# Altium PCB PDM.PcbDoc
Units mil, origin at the board's own origin, x right, y up, seen from the top; angles counter-clockwise.
Board outline 5200 x 5000 mil, 2 copper layers (Top Layer, Bottom Layer); 69 components, 47 nets, 247 pads, 65 vias.
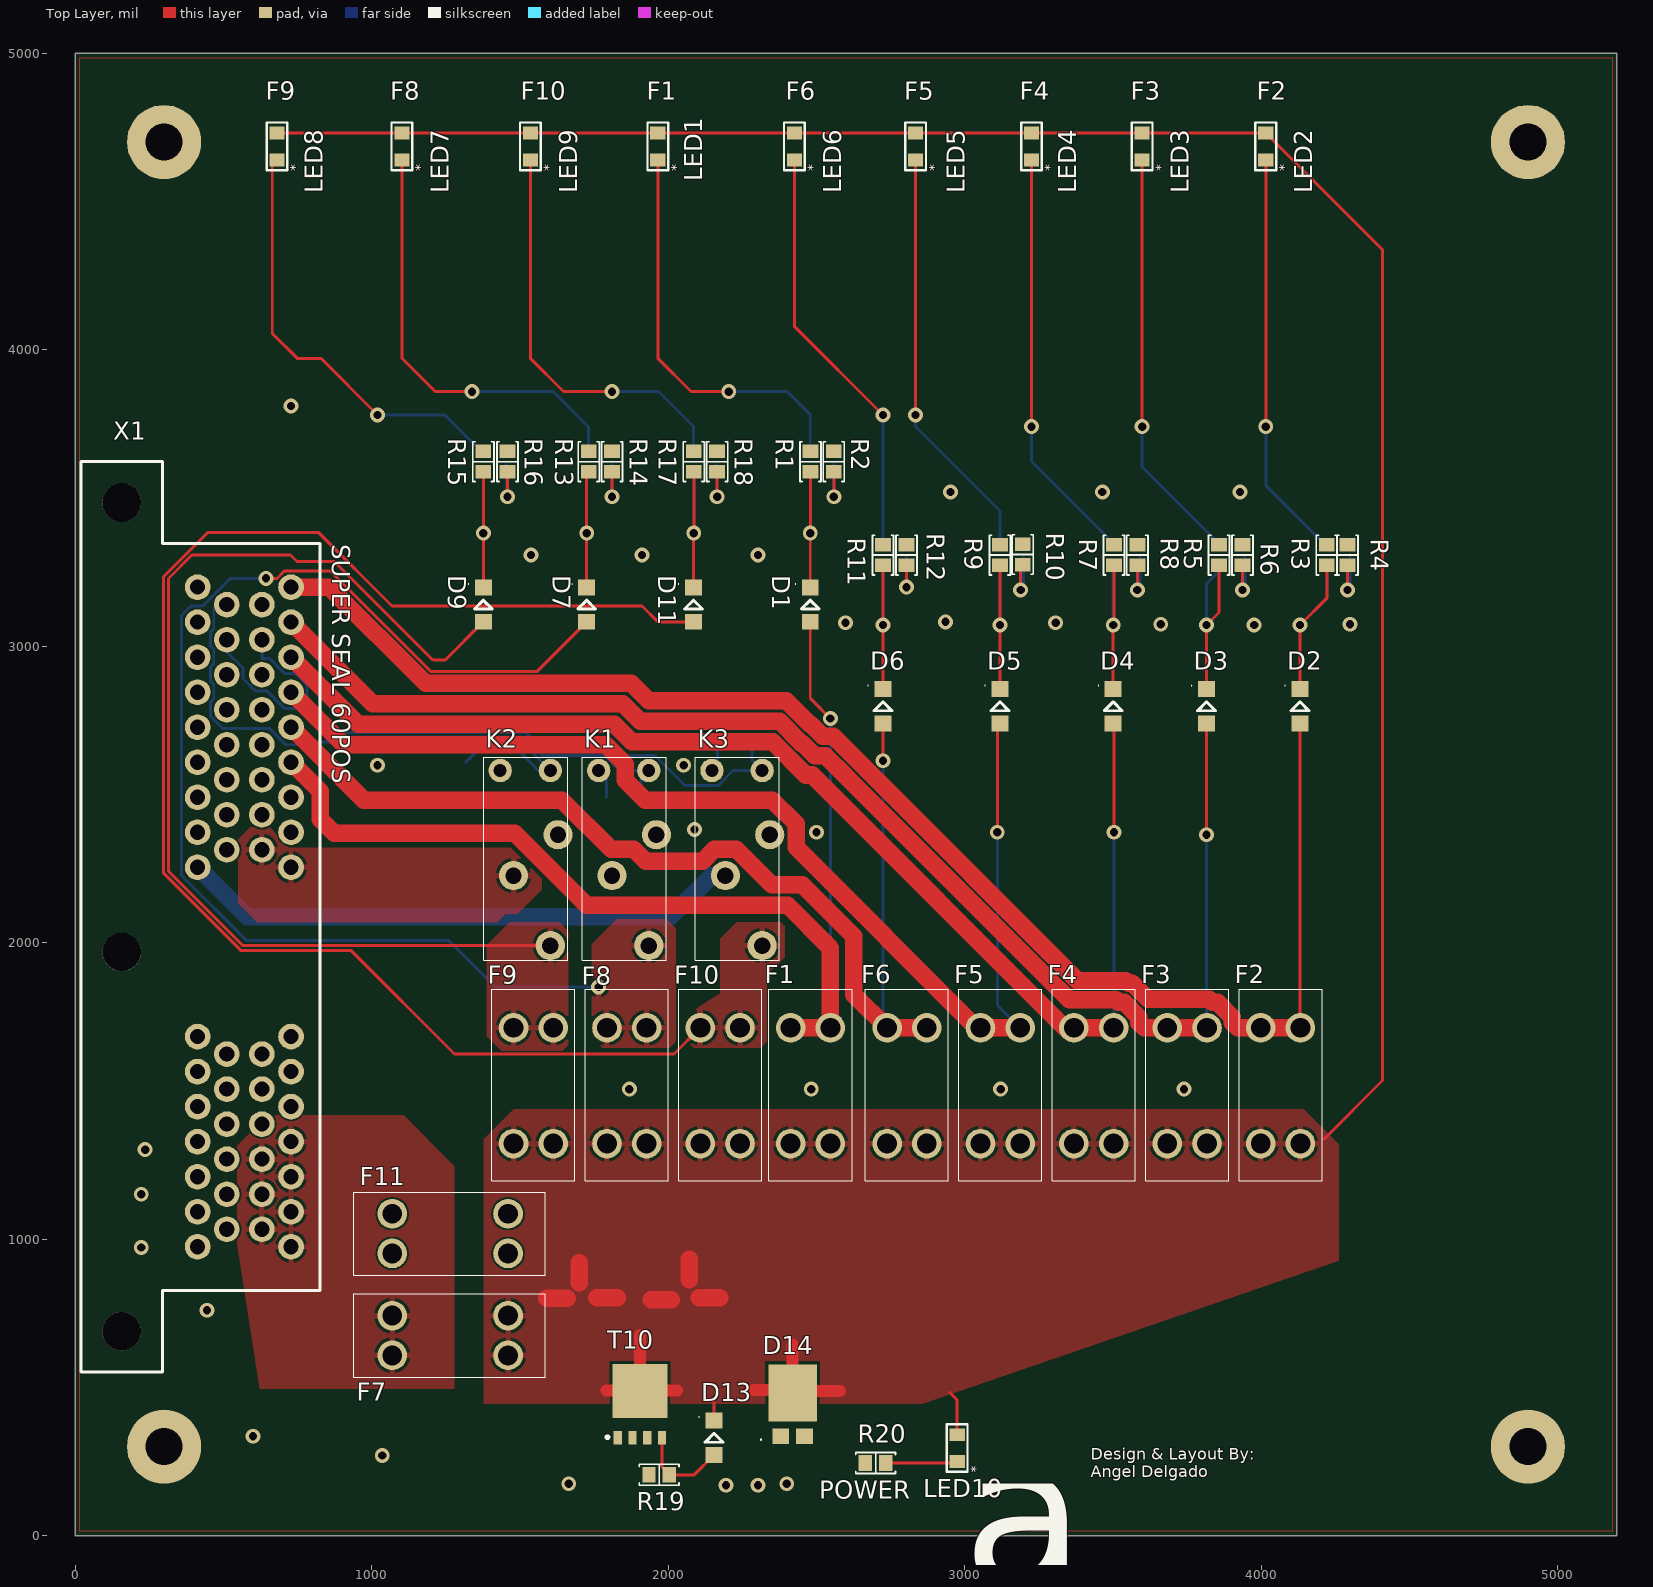
[diagram p0: Top Layer view]
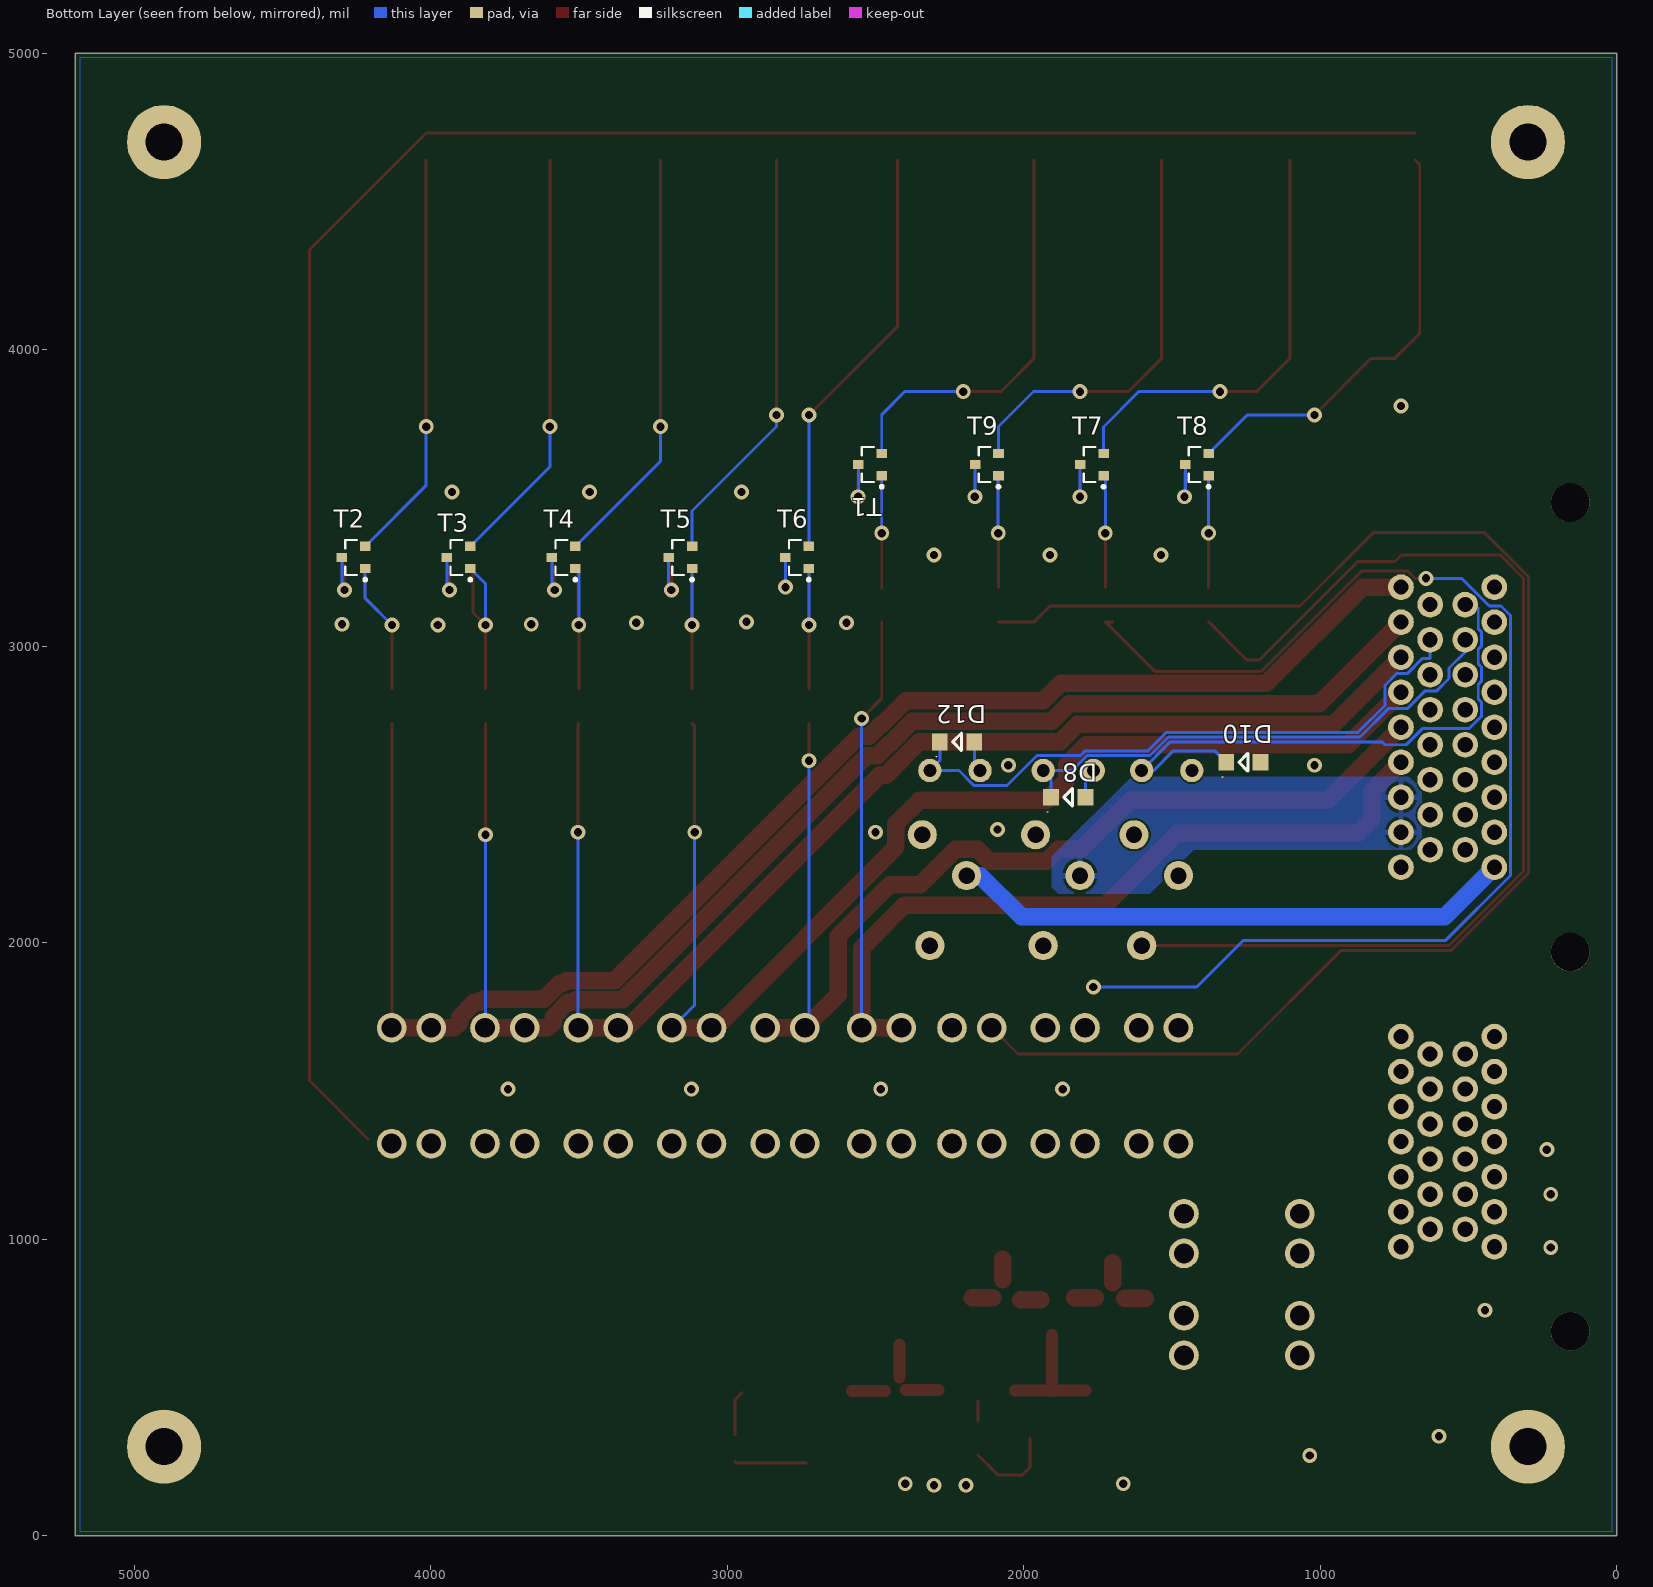
[diagram p1: Bottom Layer view, seen from below]
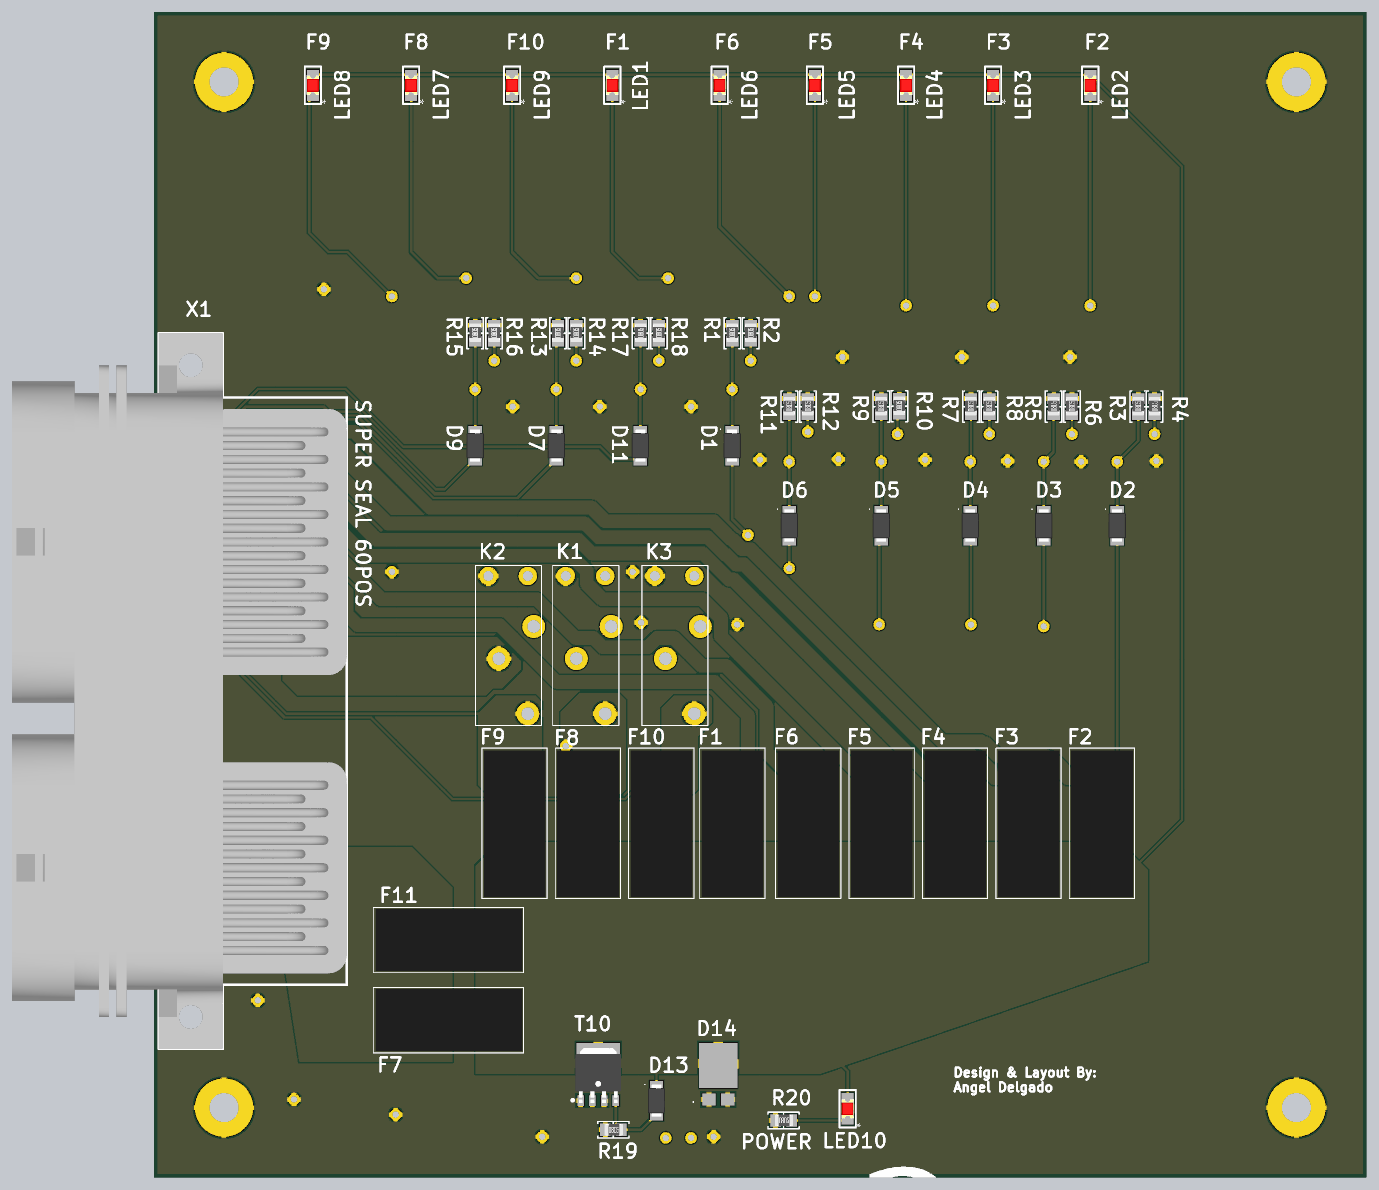
[diagram p2: 3D render of the assembled board from above, using the file's embedded part models]

## Layer stack, top to bottom
Top Solder: solder mask 0.4, Solder Resist, Dk 3.5
Top Layer: signal copper 1.4
Dielectric 1: dielectric 12.6, FR-4, Dk 4.8
Bottom Layer: signal copper 1.4
Bottom Solder: solder mask 0.4, Solder Resist, Dk 3.5

## Board outline
0,0 5200,0 5200,5000 0,5000

## Design rules (kind name [scope] priority, off if disabled: settings)
Clearance [All] p1: gap=6 ignorepadtopadclearanceinfootprint=FALSE except(8: Poly-Hole)
Height [All] p1: minheight=0 maxheight=1968.5 prefheight=500
HoleSize [All] p1: absolutevalues=TRUE maxlimit=196.85 minlimit=1 maxpercent=80.000 minpercent=20.000
PlaneConnect [InNet('GND')] p1: planeconnectstyle=Relief reliefexpansion=20 reliefentries=4 reliefconductorwidth=10 reliefairgap=10
PolygonConnect [All] p1: connectstyle=Relief reliefconductorwidth=20 reliefentries=4 polygonreliefangle="90 Angle" airgapwidth=10
RoutingVias [All] p1: holewidth=28 width=50 viastyle="Through Hole" minholewidth=28 minwidth=50 maxholewidth=28 maxwidth=50
SolderMaskExpansion [All] p1: expansion=4
Width [All] p1: maxlimit=196.85 minlimit=10 preferedwidth=10 minimp=50.000000 maximp=50.000000 favimp=50.000000
27 further rules are at their usual default settings.

## Classes and differential pairs
channel class "Relay fused CKT": "HC1_Relay fused CKT" "HC2_Relay fused CKT" "LC_Relay fused CKT"
channel class "Non-relay fused CKT": "1_Non-relay fused CKT1" "1_Non-relay fused CKT2" "2_Non-relay fused CKT" "3_Non-relay fused CKT" "4_Non-relay fused CKT" "5_Non-relay fused CKT"
component class Superseal: X1
component class RVP_OVP_HC: D13 D14 LED10 R19 R20 T10
component class PDM: F7
component class "LC_Relay fused CKT": D11 D12 F10 K3 LED9 R17 R18 T9
component class "HC2_Relay fused CKT": D9 D10 F9 K2 LED8 "LED8 (F9)" R15 R16 T8
component class "HC1_Relay fused CKT": D7 D8 F8 K1 LED7 "LED7 (F8)" R13 R14 T7
component class "5_Non-relay fused CKT": D6 F6 LED6 R11 R12 T6
component class "4_Non-relay fused CKT": D5 F5 LED5 R9 R10 T5
component class "3_Non-relay fused CKT": D4 F4 LED4 R7 R8 T4
component class "2_Non-relay fused CKT": D3 F3 LED3 R5 R6 T3
component class "1_Non-relay fused CKT2": D2 F2 LED2 R3 R4 T2
component class "1_Non-relay fused CKT1": D1 F1 LED1 R1 R2 T1

## Components (designator, comment, footprint, x,y, rotation, side; value= is the part's Value field where it differs from the comment)
D1 "DIODE" SOD123F 2479.39,3139.76 r90 top value=1A
D2 "DIODE" SOD123F 4130.94,2796.91 r90 top value=1A (schematic designator D1)
D3 "DIODE" SOD123F 3815.98,2796.91 r90 top value=1A (schematic designator D1)
D4 "DIODE" SOD123F 3501.02,2796.91 r90 top value=1A (schematic designator D1)
D5 "DIODE" SOD123F 3119.13,2796.91 r90 top value=1A (schematic designator D1)
D6 "DIODE" SOD123F 2724.68,2796.91 r90 top value=1A (schematic designator D1)
D7 "DIODE" SOD123F 1725.45,3139.76 r90 top value=1A (schematic designator D2)
D8 "DIODE" SOD123F 1850.39,2490.16 r0 bottom value=1A (schematic designator D3)
D9 "DIODE" SOD123F 1377.03,3139.76 r90 top value=1A (schematic designator D2)
D10 "DIODE" SOD123F 1259.84,2608.27 r0 bottom value=1A (schematic designator D3)
D11 "DIODE" SOD123F 2085.69,3139.76 r90 top value=1A (schematic designator D2)
D12 "DIODE" SOD123F 2225.39,2677.17 r0 bottom value=1A (schematic designator D3)
D13 "DDZ9701-7" SOD123F 2155,330 r90 top value=14Vz (schematic designator D4)
D14 "DIODE_2A1K" TO-277 2420,445 r90 top value="20 A" (schematic designator D5)
F1 "Fuse" 3568-MiniFuseHolder 2480.32,1517.4 r270 top (schematic designator F2)
F2 "Fuse" 3568-MiniFuseHolder 4065.47,1517.38 r270 top
F3 "Fuse" 3568-MiniFuseHolder 3750.51,1517.38 r270 top (schematic designator F2)
F4 "Fuse" 3568-MiniFuseHolder 3435.55,1517.38 r270 top (schematic designator F2)
F5 "Fuse" 3568-MiniFuseHolder 3120.59,1517.38 r270 top (schematic designator F2)
F6 "Fuse" 3568-MiniFuseHolder 2805.63,1517.38 r270 top (schematic designator F2)
F7 "Fuse" 3568-MiniFuseHolder 1265,675 r0 top (schematic designator F3)
F8 "Fuse" 3568-MiniFuseHolder 1860.75,1517.38 r270 top (schematic designator F1)
F9 "Fuse" 3568-MiniFuseHolder 1545.79,1517.38 r270 top (schematic designator F1)
F10 "Fuse" 3568-MiniFuseHolder 2175.71,1517.38 r270 top (schematic designator F1)
F11 "Fuse" 3568-MiniFuseHolder 1265,1018.7 r0 top (schematic designator F3)
K1 "ACTP112" ACTP112 1935.04,1989.82 r90 top
K2 "ACTP112" ACTP112 1602.87,1989.82 r90 top (schematic designator K1)
K3 "ACTP112" ACTP112 2317.21,1989.82 r90 top (schematic designator K1)
LED1 "LED" 0805_LED 1965.42,4685.04 r270 top value=Red
LED2 "LED" 0805_LED 4015.75,4685.04 r270 top value=Red (schematic designator LED1)
LED3 "LED" 0805_LED 3598.67,4685.04 r270 top value=Red (schematic designator LED1)
LED4 "LED" 0805_LED 3225.55,4685.04 r270 top value=Red (schematic designator LED1)
LED5 "LED" 0805_LED 2834.65,4685.04 r270 top value=Red (schematic designator LED1)
LED6 "LED" 0805_LED 2425.78,4685.04 r270 top value=Red (schematic designator LED1)
LED7 "LED" 0805_LED 1102.36,4685.04 r270 top value=Red (schematic designator LED2)
LED8 "LED" 0805_LED 681.07,4685.04 r270 top value=Red (schematic designator LED2)
LED9 "LED" 0805_LED 1535.43,4685.04 r270 top value=Red (schematic designator LED2)
LED10 "LED" 0805_LED 2975,295 r270 top value=Green (schematic designator LED3)
R1 "Resistor 47k 0805 1/10W 1%" "RES 0805/2012" 2480.32,3622.05 r90 top value=47k
R2 "Resistor 470 0805 1/10W 1%" "RES 0805/2012" 2559.06,3622.05 r90 top value=470
R3 "Resistor 47k 0805 1/10W 1%" "RES 0805/2012" 4221.49,3307.09 r90 top value=47k (schematic designator R1)
R4 "Resistor 470 0805 1/10W 1%" "RES 0805/2012" 4291.34,3307.09 r90 top value=470 (schematic designator R2)
R5 "Resistor 47k 0805 1/10W 1%" "RES 0805/2012" 3858.27,3307.09 r90 top value=47k (schematic designator R1)
R6 "Resistor 470 0805 1/10W 1%" "RES 0805/2012" 3937.01,3307.09 r90 top value=470 (schematic designator R2)
R7 "Resistor 47k 0805 1/10W 1%" "RES 0805/2012" 3503.94,3307.09 r90 top value=47k (schematic designator R1)
R8 "Resistor 470 0805 1/10W 1%" "RES 0805/2012" 3582.68,3307.09 r90 top value=470 (schematic designator R2)
R9 "Resistor 47k 0805 1/10W 1%" "RES 0805/2012" 3119.13,3307.09 r90 top value=47k (schematic designator R1)
R10 "Resistor 470 0805 1/10W 1%" "RES 0805/2012" 3196.48,3308.9 r90 top value=470 (schematic designator R2)
R11 "Resistor 47k 0805 1/10W 1%" "RES 0805/2012" 2724.68,3307.09 r90 top value=47k (schematic designator R1)
R12 "Resistor 470 0805 1/10W 1%" "RES 0805/2012" 2804.17,3307.09 r90 top value=470 (schematic designator R2)
R13 "Resistor 47k 0805 1/10W 1%" "RES 0805/2012" 1732.28,3622.05 r90 top value=47k (schematic designator R3)
R14 "Resistor 470 0805 1/10W 1%" "RES 0805/2012" 1811.02,3622.05 r90 top value=470 (schematic designator R4)
R15 "Resistor 47k 0805 1/10W 1%" "RES 0805/2012" 1377.03,3622.05 r90 top value=47k (schematic designator R3)
R16 "Resistor 470 0805 1/10W 1%" "RES 0805/2012" 1458.5,3622.05 r90 top value=470 (schematic designator R4)
R17 "Resistor 47k 0805 1/10W 1%" "RES 0805/2012" 2086.61,3622.05 r90 top value=47k (schematic designator R3)
R18 "Resistor 470 0805 1/10W 1%" "RES 0805/2012" 2165.35,3622.05 r90 top value=470 (schematic designator R4)
R19 "Resistor 47k 0805 1/10W 1%" "RES 0805/2012" 1970,205 r0 top value=47k (schematic designator R5)
R20 "Resistor 470 0805 1/10W 1%" "RES 0805/2012" 2700,245 r0 top value=470 (schematic designator R6)
T1 "PNP Transistor" SOT23-3 2518.76,3612.2 r0 bottom (schematic designator T)
T2 "PNP Transistor" SOT23-3 4260.86,3298.88 r0 bottom (schematic designator T)
T3 "PNP Transistor" SOT23-3 3906.53,3298.88 r0 bottom (schematic designator T)
T4 "PNP Transistor" SOT23-3 3552.2,3298.88 r0 bottom (schematic designator T)
T5 "PNP Transistor" SOT23-3 3158.5,3298.88 r0 bottom (schematic designator T)
T6 "PNP Transistor" SOT23-3 2764.8,3298.88 r0 bottom (schematic designator T)
T7 "PNP Transistor" SOT23-3 1770.73,3612.2 r0 bottom (schematic designator T2)
T8 "PNP Transistor" SOT23-3 1416.4,3612.2 r0 bottom (schematic designator T2)
T9 "PNP Transistor" SOT23-3 2125.06,3612.2 r0 bottom (schematic designator T2)
T10 "PSMN2R2-25YLC 25V Logic Level MOSFET" LFPAK-SO8 1905,436.3 r90 top value=N_Channel (schematic designator T1)
X1 "3-6437285-2" "SUPERSEAL 60POS 90Deg" 157.48,3484.25 r270 top value=CONN

## Footprints (in the part's own frame and the unit in brackets; to place one, negate y for a bottom-side part, rotate by r counter-clockwise, add the part's x,y. Pads: shape width x height; smd on the part's side, far side on the other; paste and mask are expansions set on the pad)
0805_LED [mm]
  rect 1.1x1.3 smd: 1(-1.15,0) 2(1.15,0)
  silkscreen extent -2.06,-0.89 2.03,0.89, body extent -1.05,-0.67 1.05,0.68, height 0.9
3568-MiniFuseHolder [mm] "3568 Mini Fuse Holder"
  round 2.54 hole 1.7: 1(-4.96,-1.7) 1(-4.96,1.7) 2(4.96,-1.7) 2(4.96,1.7)
  silkscreen extent -8.25,-3.56 8.13,3.56, body extent -8,-4.19 8,3.38, height 16.17
ACTP112 [mm] "ACTP112, 12V Relay"
  round 2 hole 1.1: COIL1(15,0) COIL2(15,4.3)
  round 2.5 hole 1.4: COM(0,0) NC(9.5,-0.65) NO(6,3.15)
  silkscreen extent -1.27,-1.49 16.13,5.72, body extent -1.27,-1.52 16.13,5.72, height 13.5
LFPAK-SO8 [mm] "TO, 5-Pads, Body 5.15x5.86mm (max), IPC Low Density"
  rect 1.15x0.7 smd: 1(-2.7,1.905) 2(-2.7,0.635) 3(-2.7,-0.635) 4(-2.7,-1.905)
  rect 4.6x4.7 smd: mb(1.3,0)
  silkscreen extent -2.77,2.65 -2.53,2.9, body extent -2.95,-2.5 3.05,2.5, height 1.25
"RES 0805/2012" [mm] "Chip Resistor, 2-Leads, Body 2.00x1.25mm, IPC Medium Density"
  rect 1.15x1.35 smd: 1(-0.875,0) 2(0.875,0)
  silkscreen extent -1.7,-0.9 1.7,0.9, body extent -0.95,-0.62 1.05,0.63, height 0.6
SOD123F [mm] "SODFL, 2-Leads, Body 1.80x3.50mm, IPC Low Density"
  rect 1.35x1.45 smd: 1(-1.475,0) 2(1.475,0)
  silkscreen extent -0.38,-0.76 1.8,1.29, body extent -1.75,-0.95 1.75,0.95, height 1.15
SOT23-3 [mm] "SOT23, 3-Leads, Body 2.92x2.37mm, Pitch 0.95mm, IPC Medium Density, NUP2105L"
  rect 0.9x0.8 smd: 1(-1,0.95) 2(-1,-0.95) 3(1,0)
  silkscreen extent -1.12,-1.5 0.7,2.02, body extent -0.7,-1.52 0.7,1.52, height 1.11
"SUPERSEAL 60POS 90Deg" [mm]
  round 2.2 hole 1.3: A1(7.25,14.5) A2(10.25,14.5) A3(13.25,14.5) A4(16.25,14.5) A5(19.25,14.5) A6(22.25,14.5) A7(25.25,14.5) A8(28.25,14.5) A9(31.25,14.5) A10(8.75,12) A11(11.75,12) A12(14.75,12) A13(17.75,12) A14(20.75,12) A15(23.75,12) A16(26.75,12) A17(29.75,12) A18(8.75,9) A19(11.75,9) A20(14.75,9) A21(17.75,9) A22(20.75,9) A23(23.75,9) A24(26.75,9) A25(29.75,9) A26(7.25,6.5) A27(10.25,6.5) A28(13.25,6.5) A29(16.25,6.5) A30(19.25,6.5) A31(22.25,6.5) A32(25.25,6.5) A33(28.25,6.5) A34(31.25,6.5) B1(45.75,14.5) B2(48.75,14.5) B3(51.75,14.5) B4(54.75,14.5) B5(57.75,14.5) B6(60.75,14.5) B7(63.75,14.5) B8(47.25,12) B9(50.25,12) B10(53.25,12) B11(56.25,12) B12(59.25,12) B13(62.25,12) B14(47.25,9) B15(50.25,9) B16(53.25,9) B17(56.25,9) B18(59.25,9) B19(62.25,9) B20(45.75,6.5) B21(48.75,6.5) B22(51.75,6.5) B23(54.75,6.5) B24(57.75,6.5) B25(60.75,6.5) B26(63.75,6.5)
  round 3.3 hole 3.3 unplated: CH(38.5,0) LH(0,0) RH(71,0)
  silkscreen extent -3.5,-3.5 74.5,17, body extent -3.5,-19.5 74.5,17, height 28.15
TO-277 [mm] "DFN, 3-Leads, Body 4.44x5.91mm, Pitch 3.68mm, IPC Medium Density, FSV20100V"
  rect 1.3x1.45 smd: 1(-2.794,1.016) 2(-2.794,-1.016)
  rect 4.9x4.15 smd: 3(0.913,0)
  silkscreen extent -3.12,2.67 -3.03,2.76, body extent -3.08,-2.31 3.08,2.32, height 1.2

## Part data
D1 D2 D3 D4 D5 D6 D7 D8 D9 D10 D11 D12: library part 2, "Diode Super Barrier 40V 1A Surface Mount SOD-123F", Manufacturer_id=1, MfrPartNo=1N5819HW1-7-F, Package=SOD-123, Power=40V, Supplier1PartNo=1N5819HW1-7-FDITR-ND, ComponentLink1Description=Datasheet, ComponentLink1URL=https://www.diodes.com/assets/Datasheets/1N5819HW1.pdf, Drawer_id=1, Ic=1A, idDiode=2, Link=https://www.digikey.com/product-detail/en/diodes-incorporated/1N5819HW1-7-F/1N5819HW1-7-FDITR-ND/5768523, Name=1N5819, Num_Circuits=1, Supplier1=Digi-Key, Type="Super Barrier"
D13: library part 10, "Zener Diode 14V 500mW ±5% Surface Mount SOD-123", Manufacturer_id=8, Package=SOD-123, Power=500mW, Supplier1PartNo=DDZ9701-7DICT-ND, ComponentLink1Description=Datasheet, ComponentLink1URL=https://www.diodes.com/assets/Datasheets/ds30410.pdf, Drawer_id=1, idDiode=10, Link=https://www.digikey.com/product-detail/en/diodes-incorporated/DDZ9701-7/DDZ9701-7DICT-ND/3877402, MfrPartNo=DDZ9701-7, Name=DDZ9701, Num_Circuits=1, Supplier1=Digi-Key, Type=Zener
D14: library part 11, Manufacturer_id=1, MfrPartNo=FSV20100V, Package=TO-277, Supplier1PartNo=FSV20100VCT-ND, ComponentLink1Description=Datasheet, ComponentLink1URL=https://www.fairchildsemi.com/datasheets/FS/FSV20100V.pdf, Drawer_id=1, idDiode=11, Link=https://www.digikey.com/product-detail/en/on-semiconductor/FSV20100V/FSV20100VCT-ND/5306682, Name=FSV20100V, Type=Schottky
F1 F2 F3 F4 F5 F6 F7 F8 F9 F10 F11: library part 3, Manufacturer_id=1, Drawer_id=1, idFuse=3, Name="3568 Mini Fuse Holder"
K1 K2 K3: library part 3, Coil_Voltage=12V, Manufacturer_id=1, Drawer_id=1, idRelay=3, LatestRevisionDate=17-Jul-2002, LatestRevisionNote="Re-released for DXP Platform.", Name=ACTP112, PackageReference=MODULE5B, Published=8-Jun-2000, Publisher="Altium Limited"
LED1 LED2 LED3 LED4 LED5 LED6 LED7 LED8 LED9: library part 1, Package=0805, Drawer_id=1, idLED=1, Manufacturer_id=1, Name=LED_0805_RED, Vf=0.7V
LED10: library part 2, Manufacturer_id=1, Package=0805, Brightness=7mcd, Drawer_id=1, Id=20mA, idLED=2, Link=https://www.digikey.com/product-detail/en/visual-communications-company-vcc/CMD17-21VGD-TR8/L62505CT-ND/254936, Name=CMD17_0805_GREEN, Vf=2.1V
R1 R3 R5 R7 R9 R11 R13 R15 R17 R19: library part 545, Manufacturer_id=1, Package=0805, Power=1/10W, Tolerance=1%, ComponentLink1Description=Datasheet, Created_By="Nick Mah", Created_Date=2018-10-20, Drawer_id=1, idResistor=545, Name=Res_47k_0805_1/10W_1%, Supplier 1=Digi-Key
R2 R4 R6 R8 R10 R12 R14 R16 R18 R20: library part 497, Manufacturer_id=1, Package=0805, Power=1/10W, Tolerance=1%, ComponentLink1Description=Datasheet, Created_By="Nick Mah", Created_Date=2018-10-20, Drawer_id=1, idResistor=497, Name=Res_470_0805_1/10W_1%, Supplier 1=Digi-Key
T1 T2 T3 T4 T5 T6 T7 T8 T9: library part 3, Manufacturer_id=1, MfrPartNo=MMBT4403WT1G, Package=SOT23-3, Created_By=Angel, Drawer_id=1, Ic=600mA, idBJT=3, Link=https://www.digikey.com/product-detail/en/on-semiconductor/MMBT4403WT1G/MMBT4403WT1GOSCT-ND/3487572, Name=MMBT4403WT1G, Num_Circuits=1, Type=PNP, Vce(Max)=-40V
T10: library part 3, "N-Channel 25V 100A (Tc) 106W (Tc) Surface Mount LFPAK56, Power-SO8", Manufacturer_id=6, MfrPartNo=PSMN2R2-25YLC,115, Package=LFPAK-SO8, Supplier1PartNo=1727-5299-1-ND, ComponentLink1Description=Datasheet, ComponentLink1URL=https://assets.nexperia.com/documents/data-sheet/PSMN2R2-25YLC.pdf, Created_By=Nick, Drawer_id=1, Id=100A, idFETs=3, Link=https://www.digikey.com/product-detail/en/nexperia-usa-inc/PSMN2R2-25YLC115/1727-5299-1-ND/2674299, Name=PSMN2R2, Num_Circuits=1, Rds_On=2.5mOhm, Supplier1=Digi-Key, Vdss=25V, Vgs(Max)=20V, Vgs(typ)=10V
X1: library part 3, "90 Degree", Manufacturer_id=1, ComponentLink1Description=Datasheet, Drawer_id=1, idConn=3, Link=https://www.te.com/usa-en/product-3-6437285-2.html, MfrPartNo=3-6437285-2, Name="AMP Superseal 60POS 90Deg", Num_Contacts=60, Num_Rows=4, Pitch="3 mm"

## Free pads (board coordinates)
  round 250 hole 125: MH(300,300) MH(300,4700) MH(4900,300) MH(4900,4700)

## Via types
v1: diameter 50, hole 28, Top Layer to Bottom Layer, 65 vias

## Nets (pads, with @x,y where several pads share a name; then routed paths per layer and width w, separated by ;. In a path a pad name is that pad's centre, name@x,y a point inside that pad or via, vN(x,y) a via of type N, cw(c..) or ccw(c..) an arc to the next point about the centre after c; other vN are vias at no path point)
12V_IN: F7.1 X1.B4 X1.B5 X1.B6 X1.B7 X1.B11 X1.B12 X1.B13
+12: D13.2 D14.3 F1.2 F2.2 F3.2 F4.2 F5.2 F6.2 F7.2 F8.2 F9.2 F10.2 LED1.1 LED2.1 LED3.1 LED4.1 LED5.1 LED6.1 LED7.1 LED8.1 LED9.1 LED10.1 T10.mb | length 8362
  Top Layer w10: LED8.1 LED7.1 LED9.1 LED1.1 LED6.1 LED5.1 LED4.1 LED3.1 LED2.1 4409.45,4336.61 4409.45,1534.92 4212.6,1338.07 ; D13.2 2155,453.89 ; 2950,482.48 2975,457.48 LED10.1
  Top Layer w40: 1792.89,490 T10.mb@1905,490 ; T10.mb T10.mb@1905,490 ; 1905,677.15 T10.mb@1905,490 ; 2030,490 T10.mb@1905,490 ; 2287.89,490.94 D14.3@2400,490.94 ; D14.3@2420,532.89 2420,645 ; D14.3@2467.77,487.48 2579.88,487.48
  Top Layer w59.06: 1591.37,800.81 1659.54,800.81 ; 1700.45,852.6 1700.45,920.77 ; 1759.73,802.42 1827.9,802.42 ; 1943,794.92 2011.17,794.92 ; 2070.89,863.81 2070.89,931.98 ; 2105.69,802.42 2173.86,802.42
GND: D8.1 D10.1 D12.1 D14.1 D14.2 K1.COIL2 K2.COIL2 K3.COIL2 pad.MH R1.2 R2.2 R3.2 R4.2 R5.2 R6.2 R7.2 R8.2 R9.2 R10.2 R11.2 R12.2 R13.2 R14.2 R15.2 R16.2 R17.2 R18.2 R19.1 R20.1 T10.1 T10.2 T10.3 X1.B17 X1.B18 X1.B19 X1.B23 X1.B24 X1.B25 X1.B26 | length 206.1
  Bottom Layer w10: K1.COIL2 1792.32,2553.8 D8.1 ; K3.COIL2 2167.32,2599.78 D12.1
  other v1: 1665,175 2400,175 1036.23,270 600,335 445,760 223.36,971.67 223.36,1151.57 236.22,1301.86 1869.34,1505.91 2482.94,1505.91 3121.45,1505.91 3740.16,1505.91 2500.59,2372.05 2088.86,2381.18 1020.02,2598.43 2052.35,2598.43 3976.38,3070.87 3661.42,3073.78 4299.43,3073.78 2598.43,3078.96 3307.09,3078.96 2935.5,3081.69 1537.86,3307.09 1911.84,3307.09 2303.15,3307.09 2952.76,3519.57 3464.57,3519.57 3928.92,3519.57 728.35,3809.81
HC_1_SS: K1.NO X1.A7 X1.A8
HC_2_SS: K2.NO X1.A9 X1.A17
NetD1_1: D1.1 F1.1 X1.A6 | length 3933
  Top Layer w10: D1.1 2479.39,2823.76 v1(2547.24,2755.91)
  Top Layer w59.06: X1.A6 826.77,2509.84 826.77,2416.71 874.72,2368.76 1483.6,2368.76 1726.38,2125.98 2403.03,2125.98 2547.24,1981.77 2547.24,1712.68 F1.1@2413.39,1712.68
  Bottom Layer w10: F1.1@2547.24,1712.68 v1(2547.24,2755.91)
NetD1_2: D1.2 R1.1 T1.1 | length 584
  Top Layer w10: D1.2 v1(2479.39,3380.91) 2480.32,3381.83 R1.1
  Bottom Layer w10: v1(2479.39,3380.91) T1.1
NetD2_1: D2.1 F2.1 X1.A1 | length 5057.1
  Top Layer w10: D2.1 4130.94,1714.12 F2.1@4132.4,1712.66
  Top Layer w59.06: X1.A1 857.93,3198.82 1182.27,2874.49 1876.19,2874.49 1935.4,2815.28 2398.99,2815.28 2477.89,2736.38 2481.17,2736.38 2522.17,2695.38 2557.57,2695.38 2664.16,2588.79 2664.16,2588.3 3380.7,1871.75 3544.27,1871.75 3552.78,1863.24 3564.85,1863.24 3619.27,1808.82 3824.5,1808.82 3835.14,1798.19 3852.87,1798.19 3902.97,1748.09 3902.97,1730.36 3920.67,1712.66 3998.54,1712.66 F2.1@4132.4,1712.66
NetD2_2: D2.2 R3.1 T2.1 | length 683.3
  Top Layer w10: D2.2 v1(4130.94,3070.87) 4221.49,3161.42 R3.1
  Bottom Layer w10: v1(4130.94,3070.87) 4221.49,3161.42 T2.1
NetD3_1: D3.1 F3.1 X1.A2 | length 4693.2
  Top Layer w10: v1(3815.98,2363.84) D3.1
  Top Layer w59.06: X1.A2 1003.62,2805.43 1847.59,2805.43 1906.8,2746.22 2376.04,2746.22 2450.94,2671.32 2454.23,2671.32 2495.23,2630.32 2530.62,2630.32 2599.1,2561.85 2599.1,2561.35 3278.96,1881.49 3353.75,1806.7 3511.67,1806.7 3520.18,1798.19 3537.91,1798.19 3588.01,1748.09 3588.01,1730.36 3605.71,1712.66 3683.58,1712.66 F3.1@3817.44,1712.66
  Bottom Layer w10: v1(3815.98,2363.84) 3815.98,1714.12 F3.1@3817.44,1712.66
NetD3_2: D3.2 R5.1 T3.1 | length 647
  Top Layer w10: D3.2 v1(3815.98,3070.87) 3858.27,3113.15 R5.1
  Bottom Layer w10: v1(3815.98,3070.87) 3815.98,3210.3 T3.1
NetD4_1: D4.1 F4.1 X1.A3 | length 4321.1
  Top Layer w10: D4.1 3503.94,2735.92 v1(3503.94,2372.05)
  Top Layer w59.06: X1.A3 954.57,2736.38 1818.98,2736.38 1878.2,2677.17 2353.1,2677.17 2464.99,2565.27 2485.41,2565.27 3338.02,1712.66 3368.62,1712.66 F4.1@3502.48,1712.66
  Bottom Layer w10: F4.1@3502.48,1712.66 3501.02,1714.12 3503.94,1717.03 v1(3503.94,2372.05)
NetD4_2: D4.2 R7.1 T4.1 | length 614.4
  Top Layer w10: D4.2 v1(3501.02,3070.87) 3503.94,3073.78 R7.1
  Bottom Layer w10: v1(3501.02,3070.87) 3501.02,3249.67 T4.1
NetD5_1: D5.1 F5.1 X1.A4 | length 4068
  Top Layer w10: v1(3110.24,2372.05) 3110.24,2729.94 D5.1
  Top Layer w59.06: X1.A4 905.51,2667.32 1790.38,2667.32 1856.14,2601.56 1856.14,2547.7 1923.52,2480.31 2351.82,2480.31 2431.54,2400.6 2431.54,2321.1 3039.98,1712.66 3053.66,1712.66 F5.1@3187.52,1712.66
  Bottom Layer w10: v1(3110.24,2372.05) 3110.24,1789.94 F5.1@3187.52,1712.66
NetD5_2: D5.2 R9.1 T5.1 | length 608.3
  Top Layer w10: D5.2 v1(3119.13,3070.87) R9.1
  Bottom Layer w10: v1(3119.13,3070.87) T5.1
NetD6_1: D6.1 F6.1 X1.A5 | length 3743.8
  Top Layer w10: v1(2724.68,2613.37) D6.1
  Top Layer w59.06: X1.A5 974.41,2480.31 1642,2480.31 1807.53,2314.79 1884.19,2314.79 1923.87,2275.1 2116.75,2275.1 2156.43,2314.79 2229.95,2314.79 2349.69,2195.04 2452.34,2195.04 2626.65,2020.73 2626.65,1824.71 2738.7,1712.66 F6.1@2872.56,1712.66
  Bottom Layer w10: v1(2724.68,2613.37) 2724.68,1726.68 F6.1@2738.7,1712.66
NetD6_2: D6.2 R11.1 T6.1 | length 608.6
  Top Layer w10: D6.2 v1(2724.68,3070.87) R11.1
  Bottom Layer w10: v1(2724.68,3070.87) 2724.68,3260.73 T6.1
NetD7_1: D7.1 F8.1 K1.COM | length 4101.4
  Top Layer w10: v1(643.84,3228.35) 681.07,3228.35 705.85,3253.13 860.94,3253.13 1199.05,2915.02 1558.78,2915.02 D7.1 D7.1@1700.83,3081.69
  Bottom Layer w10: v1(643.84,3228.35) 523.59,3228.35 430.26,3135.02 390.89,3135.02 359.08,3103.2 359.08,2226.35 577.55,2007.87 1259.84,2007.87 1417.32,1850.39 v1(1765.75,1850.39)
NetD7_2: D7.2 R13.1 T7.1 | length 588.9
  Top Layer w10: D7.2 v1(1725.45,3380.91) 1725.45,3580.77 R13.1
  Bottom Layer w10: v1(1725.45,3380.91) 1725.45,3568.9 T7.1
NetD8_2: D8.2 K1.COIL1 X1.A19 | length 1770.6
  Top Layer w10: X1.A19@498.81,3034.65 X1.A19
  Bottom Layer w10: X1.A19 511.81,2980.34 566.12,2926.04 566.12,2890.54 607.43,2849.24 646.8,2849.24 705.85,2790.18 769.63,2790.18 866.64,2693.17 1512.71,2693.17 1575.13,2630.75 1786.61,2630.75 1836.98,2580.38 K1.COIL1 1908.46,2553.8 D8.2
NetD9_1: D9.1 F9.1 K2.COM | length 3674.6
  Top Layer w10: D9.1 1248.09,2952.76 1206.57,2952.76 874.2,3285.13 748.58,3285.13 726.62,3307.09 393.7,3307.09 314.96,3228.35 314.96,2240.32 565.45,1989.82 K2.COM
NetD9_2: D9.2 R15.1 T8.1 | length 583.7
  Top Layer w10: D9.2 v1(1377.03,3380.91) R15.1
  Bottom Layer w10: v1(1377.03,3380.91) T8.1
NetD10_2: D10.2 K2.COIL1 X1.A18 | length 2018.2
  Top Layer w10: X1.A18 X1.A18@511.81,3166.03
  Bottom Layer w10: X1.A18 498.81,3126.76 467.69,3126.76 467.69,3058.21 457.5,3048.02 457.5,2999.16 467.69,2988.97 467.69,2940.1 457.5,2929.91 457.5,2881.05 467.69,2870.86 467.69,2821.99 457.5,2811.8 457.5,2762.94 498.81,2721.63 656.29,2721.63 710.6,2667.32 782.65,2667.32 792.5,2677.17 1506.08,2677.17 K2.COIL1 1562.43,2580.38 1496.06,2646.75 1356.39,2646.75 D10.2
NetD11_1: D11.1 F10.1 K3.COM | length 5072.8
  Top Layer w10: D11.1 1965.42,3081.69 1911.84,3135.27 1069.31,3135.27 822.12,3382.46 446.44,3382.46 298.96,3234.97 298.96,2233.69 558.83,1973.82 929.72,1973.82 1279.53,1624.02 2020.14,1624.02 F10.1@2108.78,1712.66
NetD11_2: D11.2 R17.1 T9.1 | length 584.4
  Top Layer w10: D11.2 2085.69,3380.91 2086.61,3381.83 R17.1
  Bottom Layer w10: T9.1 2086.61,3573.88 v1(2086.61,3380.91)
NetD12_2: D12.2 K3.COIL1 X1.A11 | length 2099.3
  Bottom Layer w10: X1.A11 629.92,2957.85 656.29,2957.85 705.85,2908.29 741.35,2908.29 782.65,2866.98 782.65,2799.78 873.27,2709.17 1519.34,2709.17 1581.76,2646.75 1793.24,2646.75 1809.24,2630.75 1955.9,2630.75 2056.64,2530.01 2168.78,2530.01 2219.15,2580.38 K3.COIL1 2283.46,2614.12 D12.2
NetD13_1: D13.1 R19.2 T10.4 | length 313.4
  Top Layer w10: T10.4 1980,229.45 R19.2 2088.07,205 D13.1
NetK3_NO: K3.NO X1.A34 | length 1906.9
  Bottom Layer w10: K3.NO@2147.3,2226.04 K3.NO
  Bottom Layer w59.06: X1.A34 580.71,2086.61 2007.87,2086.61 K3.NO@2147.3,2226.04
NetLED1_2: LED1.2 T1.2 | length 1392.8
  Top Layer w10: LED1.2 1965.42,3970.47 2077.62,3858.27 v1(2204.72,3858.27)
  Bottom Layer w10: v1(2204.72,3858.27) 2401.57,3858.27 2479.39,3780.45 T1.2
NetLED2_2: LED2.2 T2.2 | length 1388.7
  Top Layer w10: v1(4015.75,3740.16) LED2.2
  Bottom Layer w10: v1(4015.75,3740.16) 4015.75,3542.03 T2.2
NetLED3_2: LED3.2 T3.2 | length 1414.7
  Top Layer w10: v1(3598.67,3740.16) LED3.2
  Bottom Layer w10: v1(3598.67,3740.16) 3598.67,3604.77 T3.2
NetLED4_2: LED4.2 T4.2 | length 1422.5
  Top Layer w10: v1(3225.55,3740.16) LED4.2
  Bottom Layer w10: v1(3225.55,3740.16) 3225.55,3623.56 T4.2
NetLED5_2: LED5.2 T5.2 | length 1421.3
  Top Layer w10: v1(2834.65,3779.53) LED5.2
  Bottom Layer w10: v1(2834.65,3779.53) 2834.65,3740.16 3119.13,3455.67 T5.2
NetLED6_2: LED6.2 T6.2 | length 1427.6
  Top Layer w10: LED6.2 2425.78,4078.43 v1(2724.68,3779.53)
  Bottom Layer w10: v1(2724.68,3779.53) 2724.68,3337.03 T6.2
NetLED7_2: LED7.2 T7.2 | length 1483.7
  Top Layer w10: LED7.2 1102.36,3970.47 1214.57,3858.27 v1(1338.58,3858.27)
  Bottom Layer w10: v1(1338.58,3858.27) 1612.33,3858.27 1731.36,3739.23 T7.2
NetLED8_2: LED8.2 T8.2 | length 1471.6
  Top Layer w10: LED8.2 665.07,4623.76 665.07,4054.4 749,3970.47 829.08,3970.47 v1(1020.02,3779.53)
  Bottom Layer w10: v1(1020.02,3779.53) 1247.11,3779.53 T8.2
NetLED9_2: LED9.2 T9.2 | length 1405.5
  Top Layer w10: LED9.2 1535.43,3970.47 1647.64,3858.27 v1(1811.02,3858.27)
  Bottom Layer w10: v1(1811.02,3858.27) 1967.58,3858.27 2085.69,3740.16 T9.2
NetLED10_2: LED10.2 R20.2 | length 242.5
  Top Layer w10: R20.2 2970.28,245 LED10.2
NetR2_1: R2.1 T1.3 | length 192.3
  Top Layer w10: v1(2559.06,3503.94) R2.1
  Bottom Layer w10: T1.3 2558.13,3504.86 v1(2559.06,3503.94)
NetR4_1: R4.1 T2.3 | length 188.4
  Top Layer w10: v1@4291.34,3197.83 R4.1
  Bottom Layer w10: v1(4291.34,3188.98) 4300.23,3197.87 T2.3
NetR6_1: R6.1 T3.3 | length 186.9
  Top Layer w10: v1@3937.01,3199.29 R6.1
  Bottom Layer w10: v1(3937.01,3188.98) 3945.9,3197.87 T3.3
NetR8_1: R8.1 T4.3 | length 188.4
  Top Layer w10: v1@3582.68,3197.83 R8.1
  Bottom Layer w10: v1(3582.68,3188.98) 3591.57,3197.87 T4.3
NetR10_1: R10.1 T5.3 | length 186.9
  Top Layer w10: v1@3188.98,3199.29 R10.1@3188.98,3272.64
  Bottom Layer w10: v1(3188.98,3188.98) 3197.87,3197.87 T5.3
NetR12_1: R12.1 T6.3 | length 173.9
  Top Layer w10: v1(2804.17,3198.82) R12.1
  Bottom Layer w10: v1(2804.17,3198.82) T6.3
NetR14_1: R14.1 T7.3 | length 192.3
  Top Layer w10: v1(1811.02,3503.94) R14.1
  Bottom Layer w10: T7.3 1810.1,3504.86 v1(1811.02,3503.94)
NetR16_1: R16.1 T8.3 | length 193.1
  Top Layer w10: v1(1458.5,3503.94) R16.1
  Bottom Layer w10: T8.3 1455.77,3506.67 v1(1458.5,3503.94)
NetR18_1: R18.1 T9.3 | length 192.3
  Top Layer w10: v1(2165.35,3503.94) R18.1
  Bottom Layer w10: T9.3 2164.43,3504.86 v1(2165.35,3503.94)
pads on no net: F11.1 F11.2 K1.NC K2.NC K3.NC X1.A10 X1.A12 X1.A13 X1.A14 X1.A15 X1.A16 X1.A20 X1.A21 X1.A22 X1.A23 X1.A24 X1.A25 X1.A26 X1.A27 X1.A28 X1.A29 X1.A30 X1.A31 X1.A32 X1.A33 X1.B1 X1.B2 X1.B3 X1.B8 X1.B9 X1.B10 X1.B14 X1.B15 X1.B16 X1.B20 X1.B21 X1.B22 X1.CH X1.LH X1.RH
copper on no net:
  other v1: 2195,170 2303.15,170

## Polygon pours and split planes (outlines as drawn)
no net on Top Layer "Top Layer-No Net 11" (solid, pour order 100): 5,4445
GND on Top Layer "Top Layer-GND 1" (solid, shelved, pour order 98): 15,4985 5185,4985 5185,15 15,15
12V_IN on Top Layer "Top Layer-12V_IN" (solid, pour order 96): 1107.68,1417.32 650.1,1417.32 546.98,1314.2 546.98,984.25 622.95,495 1279.53,495 1279.53,885.83 1279.53,1245.47
no net on Top Layer "Top Layer-No Net 3" (solid, pour order 92): 3263.51,3990.42
+12 on Top Layer "Top Layer-+12 1" (solid, pour order 86): 1516.82,952.39 2235.14,952.39 2235.14,735.22 1516.82,735.22
no net on Top Layer "Top Layer-No Net 10" (solid, pour order 78): 4655.56,3529.77
HC_2_SS on Top Layer "Top Layer-HC_2_SS" (solid, pour order 50): 1451.92,2097.11 1493.72,2097.11 1494.51,2098.31 1574.75,2178.55 1574.75,2214.62 1469.82,2319.55 721.59,2319.55 656.93,2388.45 590.55,2388.45 551.18,2349.08 551.18,2131.95 614.57,2068.56 1423.93,2068.56
+12 on Top Layer "Top Layer-+12" (solid, pour order 22): 1377.87,897.9 1377.87,1337.66 1478.86,1438.64 4144.21,1438.64 4262.32,1320.53 4262.32,926.83 2859.56,445 1377.87,445
no net on Top Layer "Top Layer-No Net" (solid, pour order 58): 4319.41,3267.72
no net on Top Layer "Top Layer-No Net 1" (solid, pour order 56): 4721.39,3346.46
no net on Top Layer "Top Layer-No Net 2" (solid, pour order 52): 4409.45,4816.35
NetD9_1 on Top Layer "Top Layer-NetD9_1" (solid, pour order 26): 1437.52,1635.49 1388.31,1684.71 1388.31,1991.4 1465.47,2068.56 1634.64,2068.56 1663.9,2039.04 1663.9,1655.68 1643.71,1635.49
no net on Top Layer "Top Layer-No Net 4" (solid, pour order 40): 3868.62,4588.25
no net on Top Layer "Top Layer-No Net 5" (solid, pour order 38): 3661.42,5127.95
NetD11_1 on Top Layer "Top Layer-NetD11_1" (solid, pour order 36): 2057.6,1674.6 2086.86,1645.34 2313.01,1645.34 2333.19,1665.52 2333.19,1890.9 2392.74,1950.45 2392.74,2055.72 2379.9,2068.56 2231.32,2068.56 2175.71,2012.95 2175.71,1828.9 2120.12,1792.97 2057.6,1753.6
NetD7_1 on Top Layer "Top Layer-NetD7_1" (solid, pour order 28): 1777.58,1645.34 1742.64,1680.28 1742.64,1994.43 1826.61,2078.41 1995.78,2078.41 2025.04,2048.88 2025.04,1665.52 2004.85,1645.34
no net on Top Layer "Top Layer-No Net 6" (solid, pour order 12): 3582.68,4448.82
no net on Top Layer "Top Layer-No Net 7" (solid, pour order 8): 3582.68,4448.82
no net on Top Layer "Top Layer-No Net 8" (solid, pour order 4): 3878.46,3800.85
no net on Top Layer "Top Layer-No Net 9" (solid, pour order 0): 3385.83,3907.48
GND on Bottom Layer "Bottom Layer-GND 1" (solid, shelved, pour order 90): 15,4985 5185,4985 5185,15 15,15
HC_1_SS on Bottom Layer "Bottom Layer-HC_1_SS" (solid, pour order 54): 1574.8,2165.35 1427.17,2312.99 695.17,2312.99 659.09,2349.08 659.09,2519.68 662.09,2519.68 701.46,2559.06 1338.58,2559.06 1637.46,2559.06 1905.76,2290.76 1905.76,2187.27 1883.84,2165.35

## Silkscreen, mask and mechanical layers (free items; w line width, h text height)
Top Overlay:
  text "F9" at 642.79,4842.52 h60
  text "F8" at 1062.95,4842.52 h60
  text "F10" at 1503.54,4842.52 h60
  text "F1" at 1927.68,4842.52 h60
  text "F6" at 2396.93,4842.52 h60
  text "F5" at 2796.08,4842.52 h60
  text "F4" at 3186.66,4842.52 h60
  text "F3" at 3560.57,4842.52 h60
  text "F2" at 3984.48,4842.52 h60
  text "Design & Layout By: / Angel Delgado" at 3425.2,196.85 h39.37
  text "POWER" at 2510,125 h60
  text "a" at 2994.15,-393.7 h1181.1

## Text inside footprints (layer, text, board x,y; h text height)
LED1: Top Overlay "*" at 1985.42,4625.04 h60 r270
LED2: Top Overlay "*" at 4035.75,4625.04 h60 r270
LED3: Top Overlay "*" at 3618.67,4625.04 h60 r270
LED4: Top Overlay "*" at 3245.55,4625.04 h60 r270
LED5: Top Overlay "*" at 2854.65,4625.04 h60 r270
LED6: Top Overlay "*" at 2445.78,4625.04 h60 r270
LED7: Top Overlay "*" at 1122.36,4625.04 h60 r270
LED8: Top Overlay "*" at 701.07,4625.04 h60 r270
LED9: Top Overlay "*" at 1555.43,4625.04 h60 r270
LED10: Top Overlay "*" at 2995,235 h60 r270
X1: Top Overlay "SUPER SEAL 60POS" at 867.48,3344.25 h60 r270